# Altium PCB PCB1.PcbDoc
Units mm, origin at the board's own origin, x right, y up, seen from the top; angles counter-clockwise.
Board outline 152.4 x 101.6 mm, 2 copper layers (Top Layer, Bottom Layer); 19 components, 18 nets, 73 pads, 5 vias.
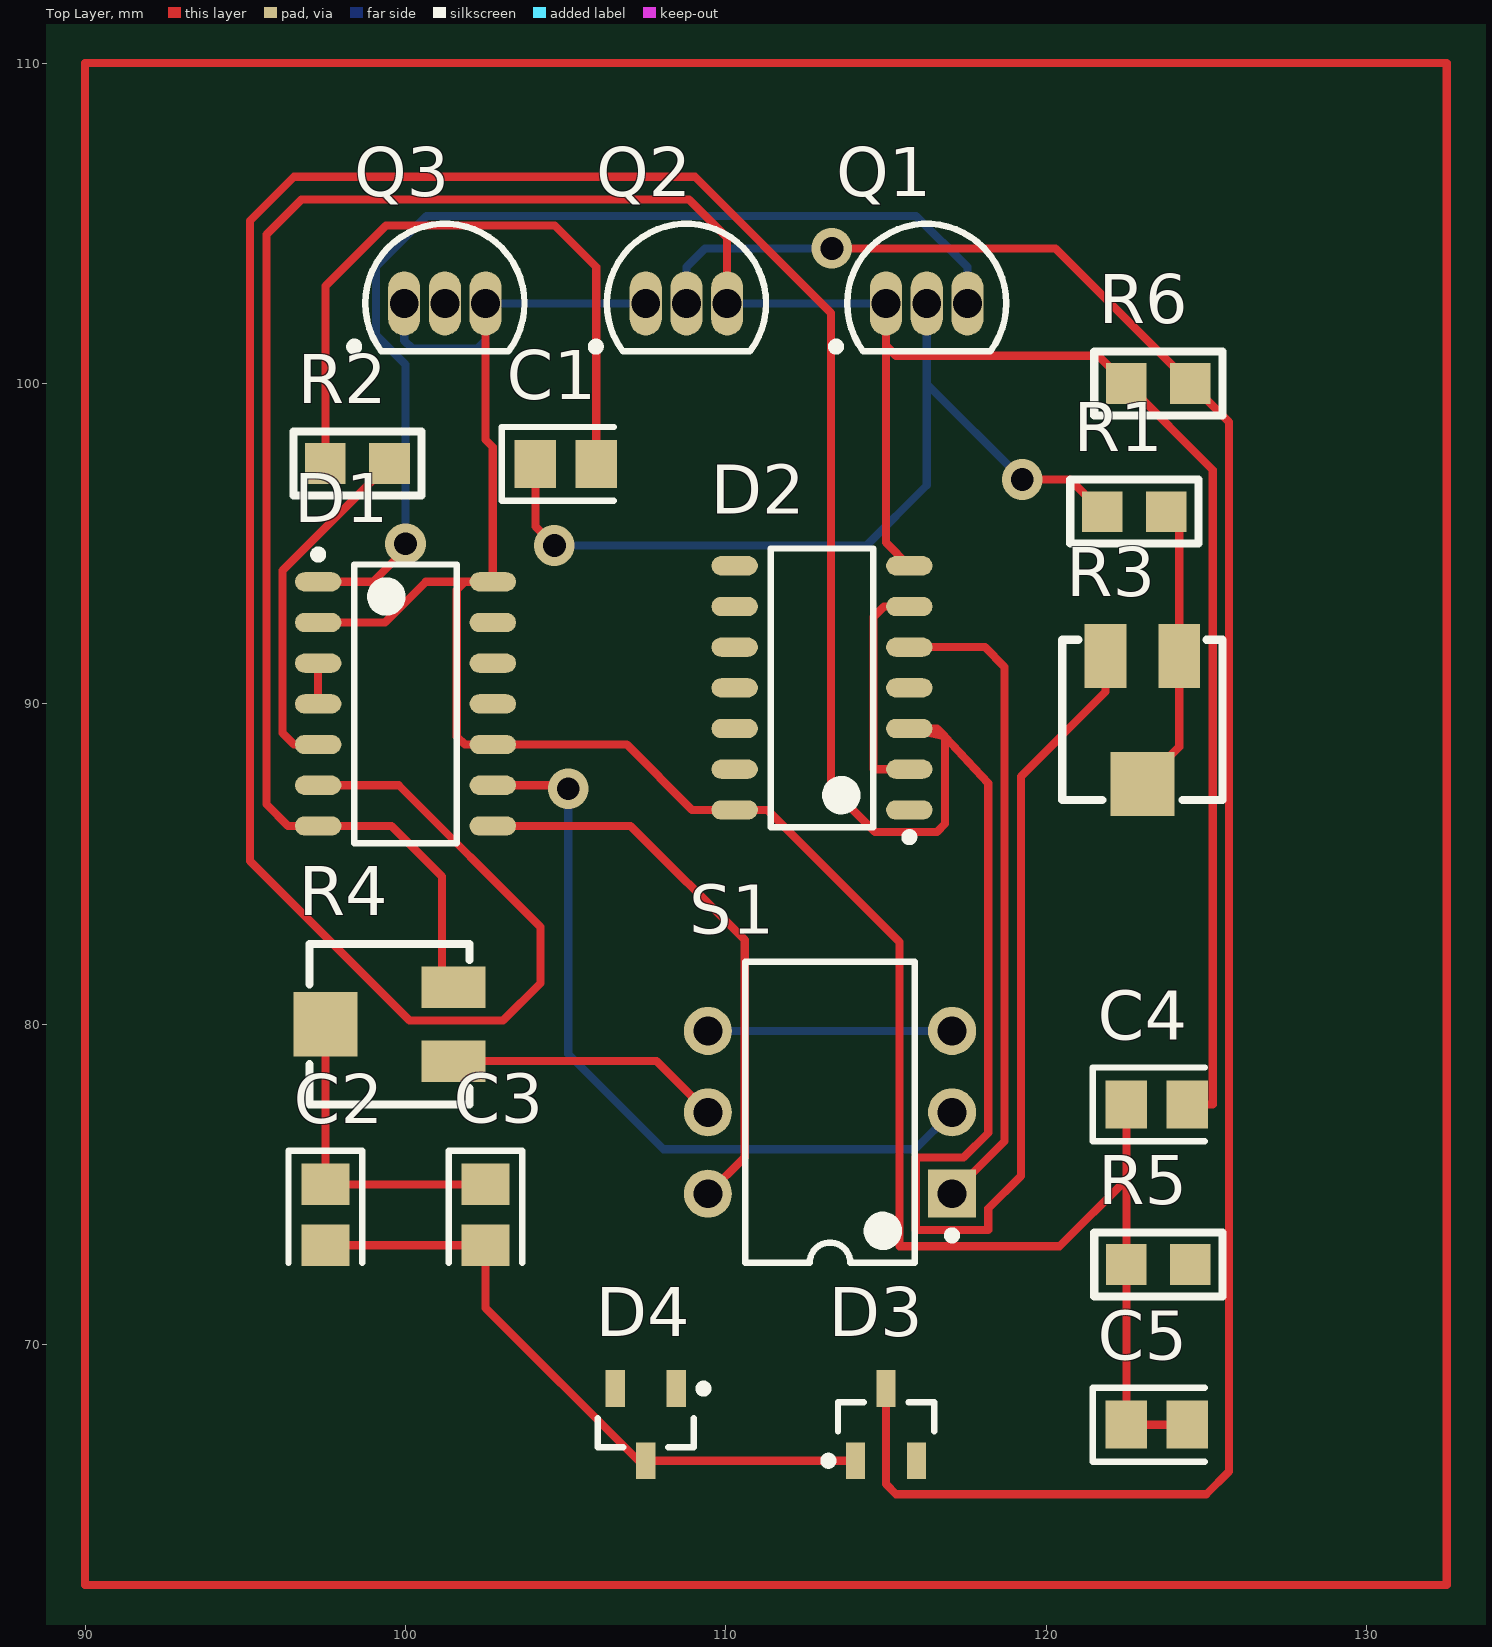
[diagram p0: Top Layer view]
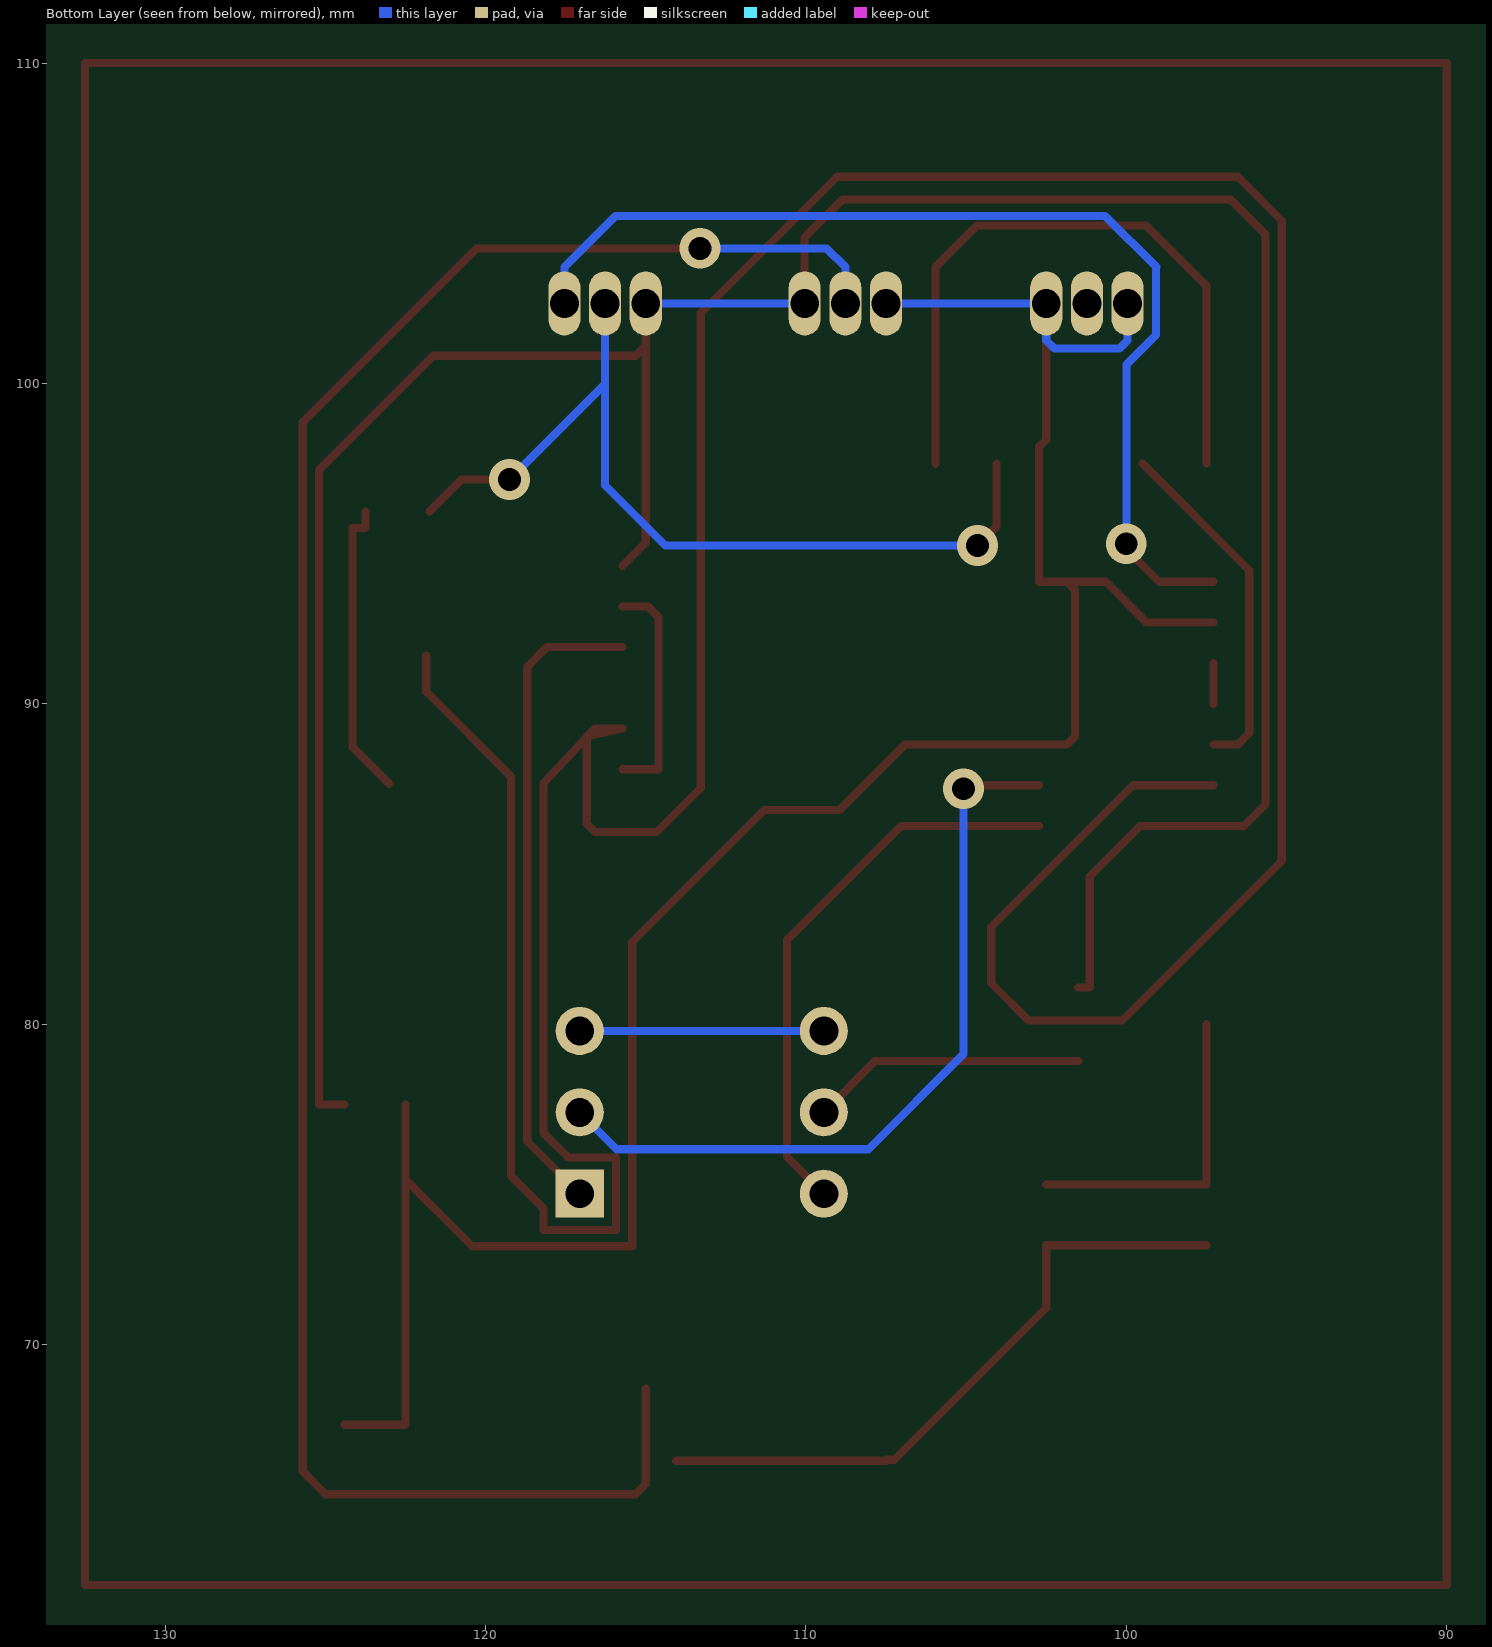
[diagram p1: Bottom Layer view, seen from below]

## Layer stack, top to bottom
Top Solder: solder mask 0.0102, Solder Resist, Dk 3.5
Top Layer: signal copper 0.0356
Dielectric 1: dielectric 0.32, FR-4, Dk 4.8
Bottom Layer: signal copper 0.0356
Bottom Solder: solder mask 0.0102, Solder Resist, Dk 3.5

## Board outline
25.4,25.4 177.8,25.4 177.8,127 25.4,127

## Design rules (kind name [scope] priority, off if disabled: settings)
Clearance [All] p1: gap=0.254 ignorepadtopadclearanceinfootprint=FALSE except(0: Arc-Hole Track-Hole SMDPad-Hole THPad-Hole Via-Hole Fill-Hole Poly-Hole Region-Hole Text-Hole)
PolygonConnect [All] p1: connectstyle=Relief reliefconductorwidth=0.254 reliefentries=4 polygonreliefangle="90 Angle" airgapwidth=0.254
RoutingVias [All] p1: holewidth=0.711 width=1.27 viastyle="Through Hole" minholewidth=0.711 minwidth=1.27 maxholewidth=0.711 maxwidth=1.27
SolderMaskExpansion [All] p1: expansion=0.102
Width [All] p1: maxlimit=0.254 minlimit=0.254 preferedwidth=0.254
30 further rules are at their usual default settings.

## Components (designator, comment, footprint, x,y, rotation, side; value= is the part's Value field where it differs from the comment)
C1 "100 нФ" C_0805 105,97.5 r0 top
C2 "100 нФ" C_0805 97.507,74.055 r270 top
C3 "100 нФ" C_0805 102.507,74.055 r270 top
C4 "100 нФ" C_0805 123.445,77.507 r0 top
C5 "100 нФ" C_0805 123.445,67.507 r0 top
D1 "DD1" TSOP127P600X152-14N 100,90 r0 top
D2 "DD2" TSOP127P600X152-14N 113,90.5 r180 top
D3 "Diode BAT18" SOT-23_N 115,67.5 r90 top
D4 "Diode BAT18" SOT-23_N 107.5,67.5 r270 top
Q1 "2N3904" TO-92A 116.27,102.5 r270 top
Q2 "2N3906" TO-92A 108.77,102.5 r270 top
Q3 "2N3904" TO-92A 101.23,102.5 r270 top
R1 "Resistor" Res 331.75,781 r0 top
R2 "Resistor" Res 307.5,782.5 r0 top
R3 "RPot SM" POT4MM-2 123,89.5 r270 top
R4 "RPot SM" POT4MM-2 99.5,80 r180 top
R5 "Resistor" Res -85.5,-612.5 r180 top
R6 "Resistor" Res 332.5,785 r0 top
S1 "SW DIP-3" DIP-6 113.25,77.25 r180 top

## Footprints (in the part's own frame and the unit in brackets; to place one, negate y for a bottom-side part, rotate by r counter-clockwise, add the part's x,y. Pads: shape width x height; smd on the part's side, far side on the other; paste and mask are expansions set on the pad)
C_0805 [mm]
  rect 1.3x1.5 smd: 1(-0.945,-0.007) 2(0.955,-0.007)
  silkscreen extent -1.99,-1.16 1.51,1.14, body extent -1,-0.63 1,0.62, height 0.6
DIP-6 [mm] "DIP; 6 Leads; Row Spacing 7.62 mm; Pitch 2.54 mm"
  rect 1.5x1.5 hole 0.9: 1(-3.81,2.54)
  round 1.5 hole 0.9: 2(-3.81,0) 3(-3.81,-2.54) 4(3.81,-2.54) 5(3.81,0) 6(3.81,2.54)
  silkscreen extent -3.94,-4.7 2.65,4.7, body extent -3.55,-4.7 3.55,4.7, height 5.46
POT4MM-2 [mm] "Square Trimming Potentiometer"
  rect 2x1.3 smd: CCW(-2,-1.15) CW(-2,1.15)
  rect 2x2 smd: W(2,0)
  silkscreen extent -2.5,-2.5 2.5,2.5
Res [mm]
  rect 1.27x1.27 smd: 1(-210,-685) 2(-208,-685)
  silkscreen extent -211,-686 -207,-684
SOT-23_N [mm] "SOT23, 3-Leads, Body 2.9x1.3mm, Pitch 0.95mm, Lead Span 2.5mm, IPC Medium Density"
  rect 1.15x0.6 smd: 1(-1.125,0.95) 2(-1.125,-0.95) 3(1.125,0)
  silkscreen extent -1.25,-1.5 0.7,1.92, body extent -0.7,-1.5 0.7,1.5, height 1.1
TO-92A [mm] "TO, Flat Index; 3 In-Line, Axial Leads; Body Dia. 4.5mm; Leads 0.51 x 0.48 mm (max)"
  oval 2x1 hole 0.9: 1(0,-1.27) 2(0,0) 3(0,1.27)
  silkscreen extent -2.48,-2.95 1.5,2.48, body extent -2.48,-2.5 1.5,2.5, height 6.86
TSOP127P600X152-14N [mm] "TSOP, 14-Leads, Body 8,65x3,90mm, Pitch 1,27mm, IPC Medium Density"
  oval 1.45x0.6 smd: 1(-2.725,3.81) 2(-2.725,2.54) 3(-2.725,1.27) 4(-2.725,0) 5(-2.725,-1.27) 6(-2.725,-2.54) 7(-2.725,-3.81) 8(2.725,-3.81) 9(2.725,-2.54) 10(2.725,-1.27) 11(2.725,0) 12(2.725,1.27) 13(2.725,2.54) 14(2.725,3.81)
  silkscreen extent -2.85,-4.35 1.6,4.78, body extent -2,-4.35 2,4.35, height 1.72

## Part data
C1 C2 C3 C4 C5: library part Capacitor, "100n", Power/Voltage=50В, Tolerance=10%, Name=0805, Type="Конденсатор ЧИП"
D3 D4: "Low-Loss RF Switching Diode", ComponentLink1Description="Manufacturer Link", ComponentLink1URL=http://www.infineon.com/, DatasheetVersion=Oct-1999, LatestRevisionDate=29-May-2009, LatestRevisionNote="IPC-7351 Footprint Added.", Note="Pin 2 is not connected and not drawn.", PackageDescription="3-Pin SOT-23 Package 0.95 mm Pitch, 2.5 mm Lead Span", PackageReference=SOT-23, PackageVersion=Sep-2001, Published=21-Mar-2003, Publisher="Altium Limited"
Q1 Q3: "NPN General Purpose Amplifier", ComponentLink1Description="Manufacturer Link", ComponentLink1URL=http://www.fairchildsemi.com/, ComponentLink2Description=Datasheet, ComponentLink2URL=http://www.fairchildsemi.com/ds/2N%2F2N3904.pdf, DatasheetVersion=1997, LatestRevisionDate=15-Jan-2003, LatestRevisionNote="PCB Footprint 'BCY-W3/D4.7' replaced", PackageDescription="TO, Flat Index; 3 In-Line, Axial Leads; Body Dia. 4.5mm; Leads 0.51 x 0.48 mm (max)", PackageReference=TO-92A, PackageVersion=Sep-1998, Published=8-Jun-2000, Publisher="Altium Limited"
Q2: "PNP General Purpose Amplifier", ComponentLink1Description="Manufacturer Link", ComponentLink1URL=http://www.fairchildsemi.com/, ComponentLink2Description=Datasheet, ComponentLink2URL=http://www.fairchildsemi.com/ds/2N%2F2N3906.pdf, DatasheetVersion=1997, LatestRevisionDate=15-Jan-2003, LatestRevisionNote="PCB Footprint 'BCY-W3/D4.7' replaced", PackageDescription="TO, Flat Index; 3 In-Line, Axial Leads; Body Dia. 4.5mm; Leads 0.51 x 0.48 mm (max)", PackageReference=TO-92A, PackageVersion=Sep-1998, Published=8-Jun-2000, Publisher="Altium Limited"
R3 R4: "Square Trimming Potentiometer", ComponentLink1Description="Manufacturer Link", ComponentLink1URL=http://bourns.com/2/search.html, DatasheetVersion=Oct-2003, PackageDescription="Square Trimming Potentiometer", PackageReference=POT4MM-2, Published=17-Dec-2003, Publisher="Altium Limited"
S1: "DIP Switch, 3 Position, SPST", Code_JEDEC=MO-001-AM, LatestRevisionDate=17-Jul-2002, LatestRevisionNote="Re-released for DXP Platform.", PackageReference=DIP-6, Published=24-Mar-1999, Publisher="Altium Limited"

## Via types
v1: diameter 1.27, hole 0.711, Top Layer to Bottom Layer, 5 vias

## Nets (pads, with @x,y where several pads share a name; then routed paths per layer and width w, separated by ;. In a path a pad name is that pad's centre, name@x,y a point inside that pad or via, vN(x,y) a via of type N, cw(c..) or ccw(c..) an arc to the next point about the centre after c; other vN are vias at no path point)
GND: C4.2 D1.7 D2.7 Q1.1 Q2.3 R4.CCW R6.1 | length 91.3
  Top Layer w0.254: R4.CCW 101.143,81.15 101.143,84.615 99.568,86.19 D1.7 96.334,86.19 95.656,86.868 95.656,104.648 96.749,105.74 108.854,105.74 110.04,104.554 Q2.3 ; Q1.1 115,101.179 ; D2.7 115,95.035 115,101.179 ; C4.2 125.197,77.5 125.197,97.303 R6.1 121.637,100.863 115.316,100.863 115,101.179
  Bottom Layer w0.254: Q2.3 Q1.1
NetC1_1: C1.1 Q1.2 R1.1 | length 28
  Top Layer w0.254: C1.1 104.055,95.538 v1(104.648,94.945) ; v1(119.253,97.003) 120.747,97.003 R1.1
  Bottom Layer w0.254: v1(104.648,94.945) 114.39,94.945 116.27,96.825 116.27,99.986 ; Q1.2 116.27,99.986 ; v1(119.253,97.003) 116.27,99.986
NetC1_2: C1.2 R2.1 | length 21.5
  Top Layer w0.254: R2.1 97.5,103.037 99.39,104.927 104.66,104.927 105.955,103.632 C1.2
NetC2_1: C2.1 C3.1 R4.W | length 10
  Top Layer w0.254: R4.W C2.1 C3.1
NetC2_2: C2.2 C3.2 D3.1 D4.3 | length 20.5
  Top Layer w0.254: C2.2 C3.2 102.5,71.145 107.239,66.407 107.5,66.407 D4.3 110.769,66.375 D3.1
NetD1_1: D1.1 Q1.3 | length 33.3
  Top Layer w0.254: D1.1 98.984,93.81 100,94.826 v1(100,95)
  Bottom Layer w0.254: v1(100,95) 100,100.588 99.079,101.509 99.079,103.613 99.06,103.632 100.66,105.232 115.94,105.232 117.54,103.632 Q1.3
NetD1_3: D1.3 D1.4 | length 1.3
  Top Layer w0.254: D1.4 D1.3
NetD1_5: D1.5 R2.2 | length 11.1
  Top Layer w0.254: D1.5 96.52,88.73 96.164,89.086 96.164,94.164 R2.2
NetD1_6: D1.6 D2.3 R3.CCW | length 126.2
  Top Layer w0.254: D1.6 99.789,87.46 104.216,83.033 104.216,81.28 103.048,80.112 100.127,80.112 95.148,85.09 95.148,105.08 96.52,106.451 109.033,106.451 113.284,102.2 113.284,87.376 114.656,86.004 116.586,86.004 116.84,86.258 116.84,88.976 ; R3.CCW 121.85,90.379 119.207,87.736 119.207,75.26 118.191,74.244 118.191,73.579 115.929,73.579 115.929,75.841 117.421,75.841 118.191,76.611 118.191,87.523 116.84,88.976 ; 116.84,88.976 D2.3 116.586,89.23 116.84,88.976
NetD1_8: D1.8 S1.6 | length 17.7
  Top Layer w0.254: D1.8 107.028,86.19 110.592,82.626 110.592,75.862 S1.6
NetD1_9: D1.9 S1.2 | length 24.4
  Top Layer w0.254: D1.9 104.97,87.46 v1(105.08,87.351)
  Bottom Layer w0.254: v1(105.08,87.351) 105.08,79.07 108.052,76.098 115.908,76.098 S1.2
NetD2_2: D2.2 D2.6 | length 7.1
  Top Layer w0.254: D2.2 114.605,87.96 114.605,92.71 114.935,93.04 D2.6
NetD2_5: D2.5 S1.1 | length 20.4
  Top Layer w0.254: D2.5 118.085,91.77 118.699,91.156 118.699,76.349 S1.1
NetD3_3: D3.3 Q2.2 R6.2 | length 67.4
  Top Layer w0.254: v1(113.309,104.216) 120.284,104.216 R6.2 125.705,98.795 125.705,66.04 124.993,65.329 115.316,65.329 115,65.645 D3.3
  Bottom Layer w0.254: Q2.2 108.77,103.632 109.354,104.216 v1(113.309,104.216)
NetR1_2: R1.2 R3.CW R3.W | length 9.4
  Top Layer w0.254: R3.W 124.15,88.65 R3.CW 124.15,95.492 123.75,95.492 R1.2
NetR4_CW: R4.CW S1.5 | length 8.6
  Top Layer w0.254: R4.CW 107.84,78.85 S1.5
NetS1_3: S1.3 S1.4 | length 7.6
  Bottom Layer w0.254: S1.4 S1.3
VCC: C4.1 C5.1 C5.2 D1.2 D1.10 D1.14 D2.14 Q2.1 Q3.1 Q3.3 R5.2 | length 75.6
  Top Layer w0.254: D1.2 99.365,92.54 100.635,93.81 101.854,93.81 ; Q3.3 102.5,98.244 102.725,98.019 D1.14 101.854,93.81 ; C4.1 122.5,75.154 ; C5.2 C5.1 R5.2 122.5,75.154 ; 101.854,93.81 101.6,93.556 101.6,88.984 101.854,88.73 D1.10 106.909,88.73 108.949,86.69 D2.14 111.303,86.69 115.421,82.572 115.421,73.071 120.417,73.071 122.5,75.154
  Bottom Layer w0.254: Q3.1 99.96,101.346 100.214,101.092 102.246,101.092 102.5,101.346 Q3.3 Q2.1
pads on no net: D1.11 D1.12 D1.13 D2.1 D2.4 D2.8 D2.9 D2.10 D2.11 D2.12 D2.13 D3.2 D4.1 D4.2 Q3.2 R5.1
copper on no net: | length 180
  Top Layer w0.254: 90,62.5 90,110 92.5,110 132.5,110 132.5,62.5 92.5,62.5 90,62.5